# Altium PCB main.PcbDoc
Units mm, origin at the board's own origin, x right, y up, seen from the top; angles counter-clockwise.
Board outline 45 x 34 mm, 2 copper layers (Top Layer, Bottom Layer); 5 components, 5 nets, 21 pads, 0 vias.
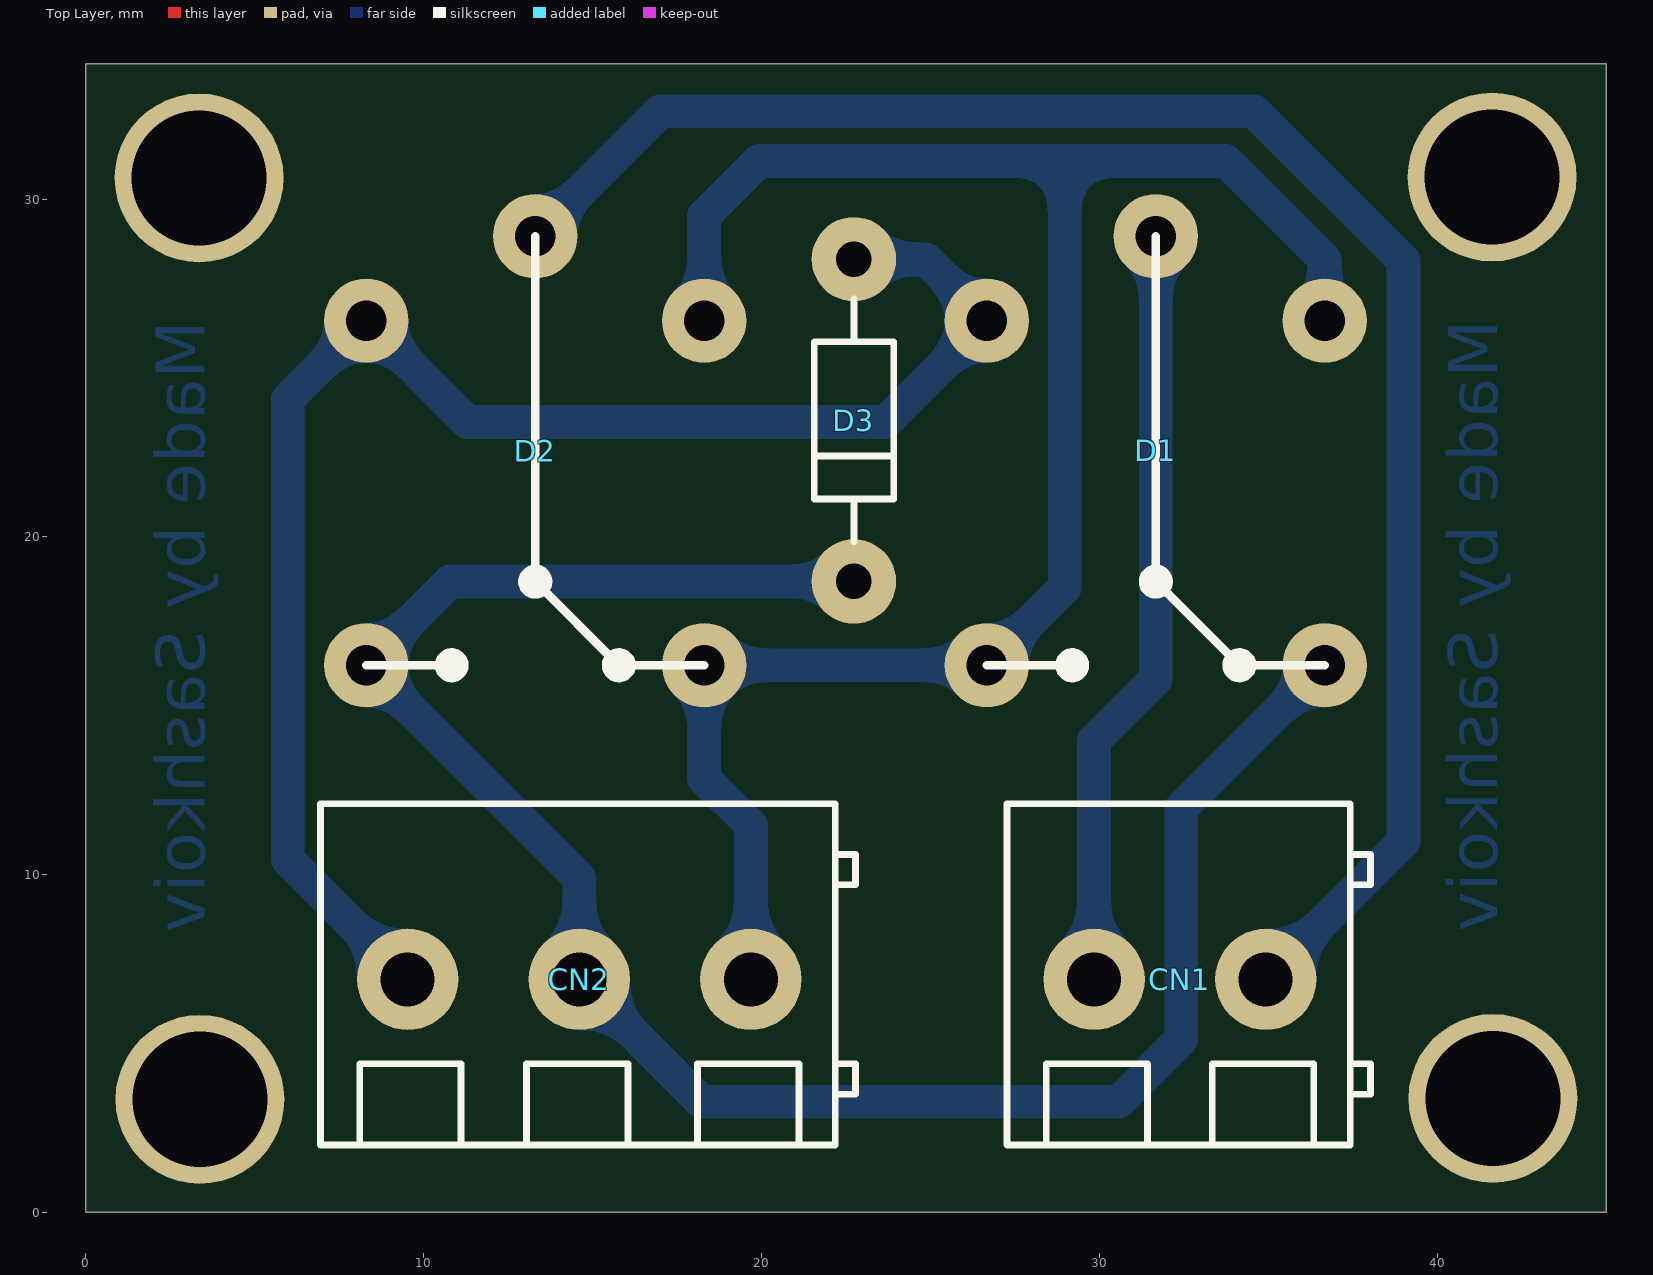
[diagram p0: Top Layer view]
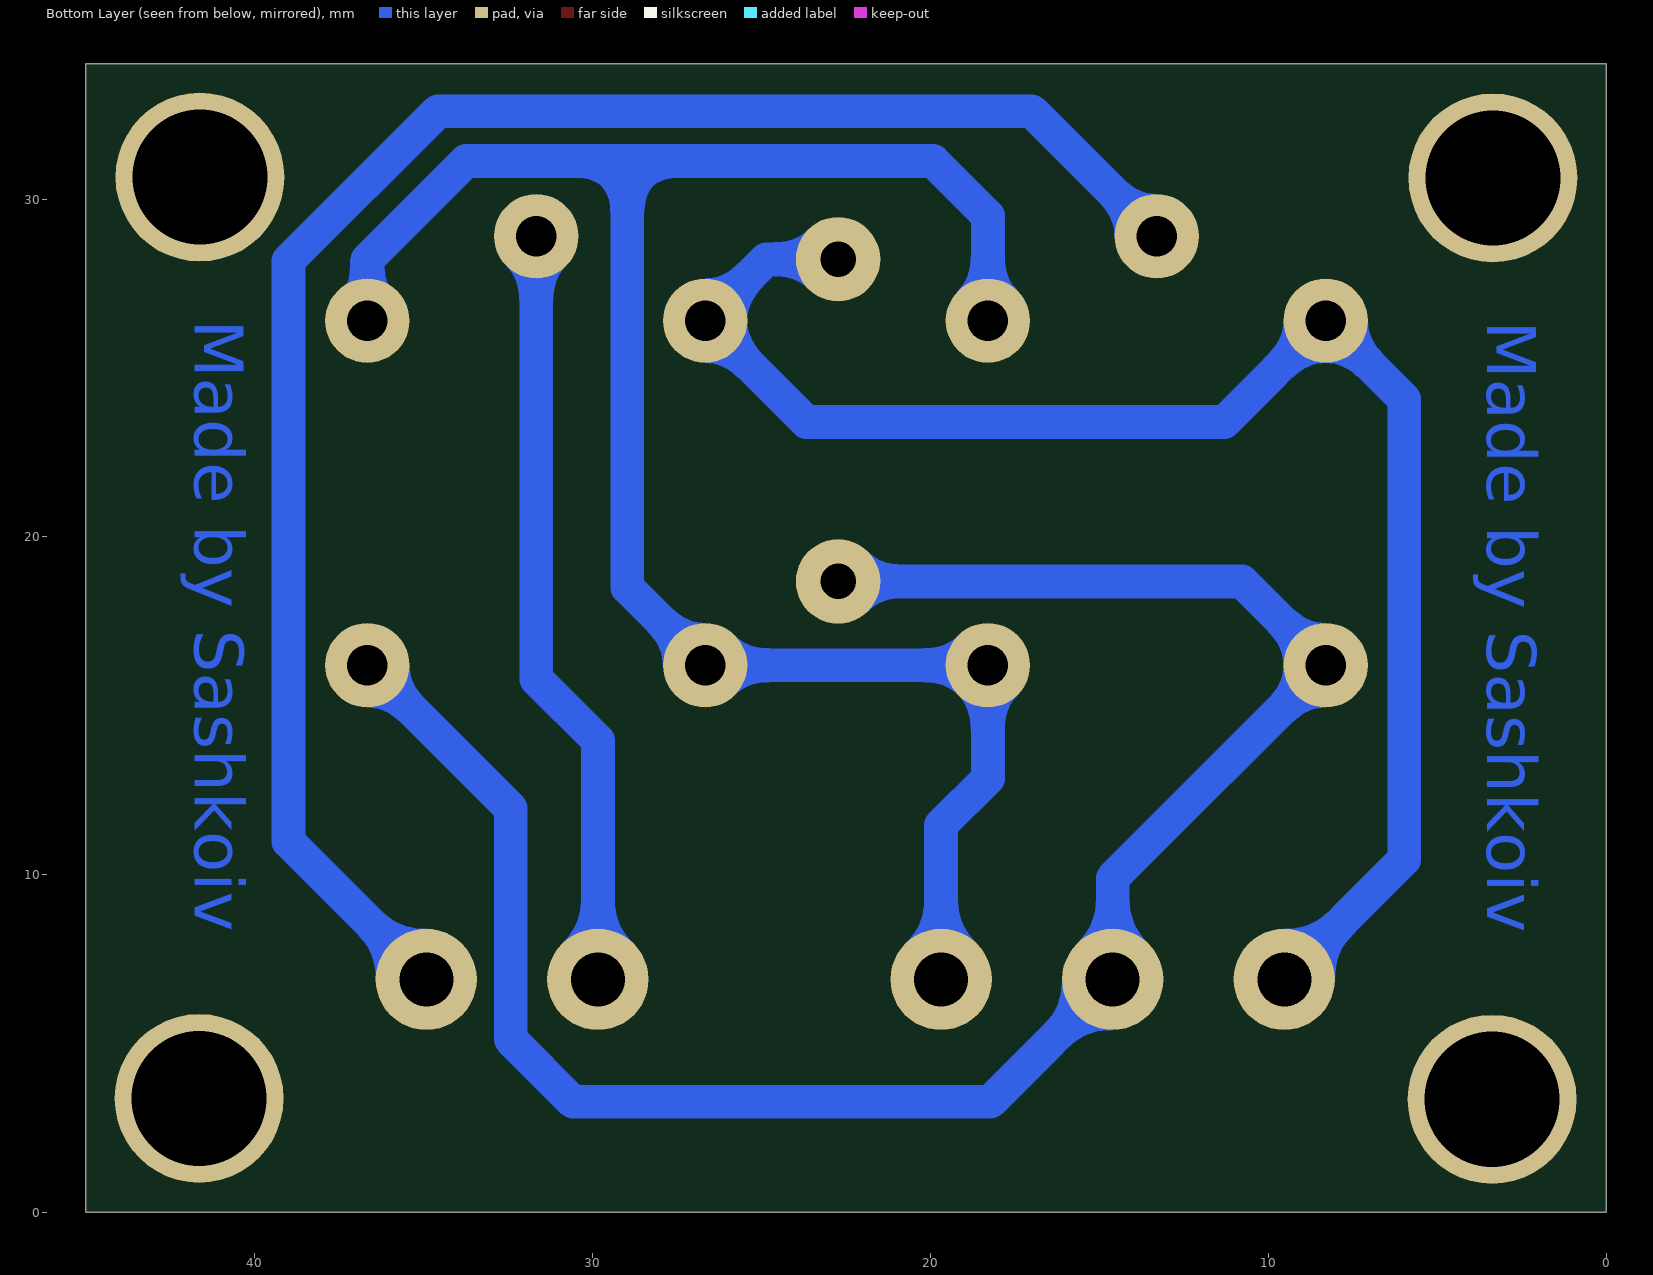
[diagram p1: Bottom Layer view, seen from below]

## Layer stack, top to bottom
Top Solder: solder mask 0.0102, Solder Resist, Dk 3.5
Top Layer: signal copper 0.0356
Dielectric 1: dielectric 0.32, FR-4, Dk 4.8
Bottom Layer: signal copper 0.0356
Bottom Solder: solder mask 0.0102, Solder Resist, Dk 3.5

## Board outline
0,0 0,34 45,34 45,0

## Design rules (kind name [scope] priority, off if disabled: settings)
Clearance [All] p1: gap=0.254 ignorepadtopadclearanceinfootprint=FALSE except(0: Arc-Hole Track-Hole SMDPad-Hole THPad-Hole Via-Hole Fill-Hole Poly-Hole Region-Hole Text-Hole)
PolygonConnect [All] p1: connectstyle=Relief reliefconductorwidth=0.254 reliefentries=4 polygonreliefangle="90 Angle" airgapwidth=0.254
RoutingVias [All] p1: holewidth=0.711 width=1.27 viastyle="Through Hole" minholewidth=0.711 minwidth=1.27 maxholewidth=0.711 maxwidth=1.27
SolderMaskExpansion [All] p1: expansion=0.102
Width [All] p1: maxlimit=10 minlimit=0.254 preferedwidth=0.254
30 further rules are at their usual default settings.

## Components (designator, comment, footprint, x,y, rotation, side; value= is the part's Value field where it differs from the comment)
CN1 "CN_1X2F" CN_WURTH_691216510002 29.845,6.9 r0 top
CN2 "CN_1X3F" CN_WURTH_691216510003 9.525,6.9 r0 top
D1 "MSC_5pin_Relay" MSC_SRA-12VDC-CL 31.67,22.55 r90 top
D2 "MSC_5pin_Relay" MSC_SRA-12VDC-CL 13.3,22.55 r90 top
D3 "DIO" DIO_Fairchild_1N4007 22.735,23.45 r90 top

## Footprints (in the part's own frame and the unit in brackets; to place one, negate y for a bottom-side part, rotate by r counter-clockwise, add the part's x,y. Pads: shape width x height; smd on the part's side, far side on the other; paste and mask are expansions set on the pad)
CN_WURTH_691216510002 [mm]
  round 3 hole 1.6: 1(0,0) 2(5.08,0)
  silkscreen extent -2.58,-4.9 8.18,5.2, body extent -2.58,-4.9 8.18,5.2, height 13.8
CN_WURTH_691216510003 [mm]
  round 3 hole 1.6: 1(0,0) 2(5.08,0) 3(10.16,0)
  silkscreen extent -2.58,-4.9 13.26,5.2, body extent -2.58,-4.9 13.26,5.2, height 13.8
DIO_Fairchild_1N4007 [mm] "AXIAL, 2-Leads, Diameter 2.35mm"
  round 2.5 hole 1.05: 1(-4.77,0) 2(4.77,0)
  silkscreen extent -3.59,-1.17 3.59,1.17
MSC_SRA-12VDC-CL [mm]
  round 2.5 hole 1.2: 1(3.85,5) 2(6.35,0) 3(3.85,-5) 4(-6.35,-5) 5(-6.35,5)
  silkscreen extent -6.6,-5 6.35,5, body extent -8,-6.2 8,6.2, height 14.2

## Part data
CN1: library part 02_00092, "WURTH ELEKTRONIK - 691216510002 - T/BLOCK, 5.08MM", Manufacturer=Wurth, Manufacturer PN=691216510002, Supplier Part Number 1=1841252, Value1="2 pin", AutoId=92, ComponentLink1Description=Datasheet, ComponentLink1URL=X:\01_dataSheets\CN_WURTH_69121651000x.pdf, ComponentLink2Description=ComponentVerificationSheet, ComponentLink2URL=X:\02_ComponentVerificationSheets\, DeviceType=Connector_2, Id=02_00092, MountType=THT, Status="0 - Unchecked", Supplier 1=Farnell
CN2: library part 02_00091, "WURTH ELEKTRONIK 691216510003 - T/BLOCK, 5,08mm 3W", Manufacturer=Wurth, Manufacturer PN=691216510003, Supplier Part Number 1=1841253, Value1="3 pin", AutoId=91, ComponentLink1Description=Datasheet, ComponentLink1URL=X:\01_dataSheets\CN_WURTH_69121651000x.pdf, ComponentLink2Description=ComponentVerificationSheet, ComponentLink2URL=X:\02_ComponentVerificationSheets\, DeviceType=Connector_3, Id=02_00091, MountType=THT, Status="0 - Unchecked", Supplier 1=Farnell
D1 D2: library part 12_00143, Manufacturer=SRA, Manufacturer PN=SRA-12VDC-CL, Value1="5 pin relay", Value2=relay, Value3=12V, AutoId=154, ComponentLink1Description=Datasheet, ComponentLink1URL=X:\01_Datasheets\, ComponentLink2Description=ComponentVerificationSheet, ComponentLink2URL=X:\02_ComponentVerificationSheets\, DeviceType=misc, Id=12_00143, MountType=THD, Status="0 - Unchecked"
D3: library part 03_00065, "Rectifiers Vr/1000V Io/1A", Manufacturer=Fairchild, Manufacturer PN=1N4007, Supplier Part Number 1=512-1N4007, Value2="1000V Io/1A", AutoId=65, ComponentLink1Description=Datasheet, ComponentLink1URL=X:\01_Datasheets\DIO_Fairchild_1N4007.pdf, ComponentLink2Description=ComponentVerificationSheet, ComponentLink2URL=X:\02_ComponentVerificationSheets\, DeviceType=diode, Id=03_00065, MountType=SMD, Status="0 - Unchecked", SubType=Rectifier, Supplier 1=Mouser, Value1=1N4007, Value3=Fairchild

## Free pads (board coordinates)
  round 5 hole 4: Z(3.35,30.625) Z(3.375,3.35) Z(41.625,30.65) Z(41.65,3.375)

## Nets (pads, with @x,y where several pads share a name; then routed paths per layer and width w, separated by ;. In a path a pad name is that pad's centre, name@x,y a point inside that pad or via, vN(x,y) a via of type N, cw(c..) or ccw(c..) an arc to the next point about the centre after c; other vN are vias at no path point)
Close: CN2.1 D1.1 D2.1 D3.2 | length 47.5
  Bottom Layer w1: CN2.1 5.975,10.45 5.975,24.075 D2.1 11.3,23.4 23.67,23.4 D1.1 24.85,28.22 D3.2
GND: CN2.3 D1.3 D1.5 D2.3 D2.4 | length 59.3
  Bottom Layer w1: D2.3 18.3,29.505 19.92,31.125 28.975,31.125 ; CN2.3 19.685,11.465 18.3,12.85 D2.4 D1.5 28.975,18.505 28.975,31.125 ; D1.3 36.67,28.205 33.75,31.125 28.975,31.125
NetCN1_1: CN1.1 D1.2 | length 22.8
  Bottom Layer w1: CN1.1 29.845,13.97 31.67,15.795 D1.2
NetCN1_2: CN1.2 D2.2 | length 52
  Bottom Layer w1: D2.2 17,32.6 34.575,32.6 39,28.175 39,10.975 CN1.2
Open: CN2.2 D1.4 D2.5 D3.1 | length 60.3
  Bottom Layer w1: D3.1 10.78,18.68 D2.5 14.605,9.895 CN2.2 18.23,3.275 30.575,3.275 32.425,5.125 32.425,11.955 D1.4

## Other copper
Bottom Layer:
  text "Made by Sashkoiv" at 42.275,26.425 h2.5 r90
  text "Made by Sashkoiv" at 4,26.4 h2.5 r90

## Silkscreen, mask and mechanical layers (free items; w line width, h text height)
Mechanical 1:
  the board outline again, w0.5

## Dimensions
0,34 to 0,0 on Top Overlay
0,0 to 45,0 on Top Overlay